# Altium PCB EstmetPCB.PcbDoc
Units mm, origin at the board's own origin, x right, y up, seen from the top; angles counter-clockwise.
Board outline 152.4 x 101.6 mm, 2 copper layers (Top Layer, Bottom Layer); 30 components, 29 nets, 121 pads, 22 vias.
Unrouted connection lines stored in the file: 39.
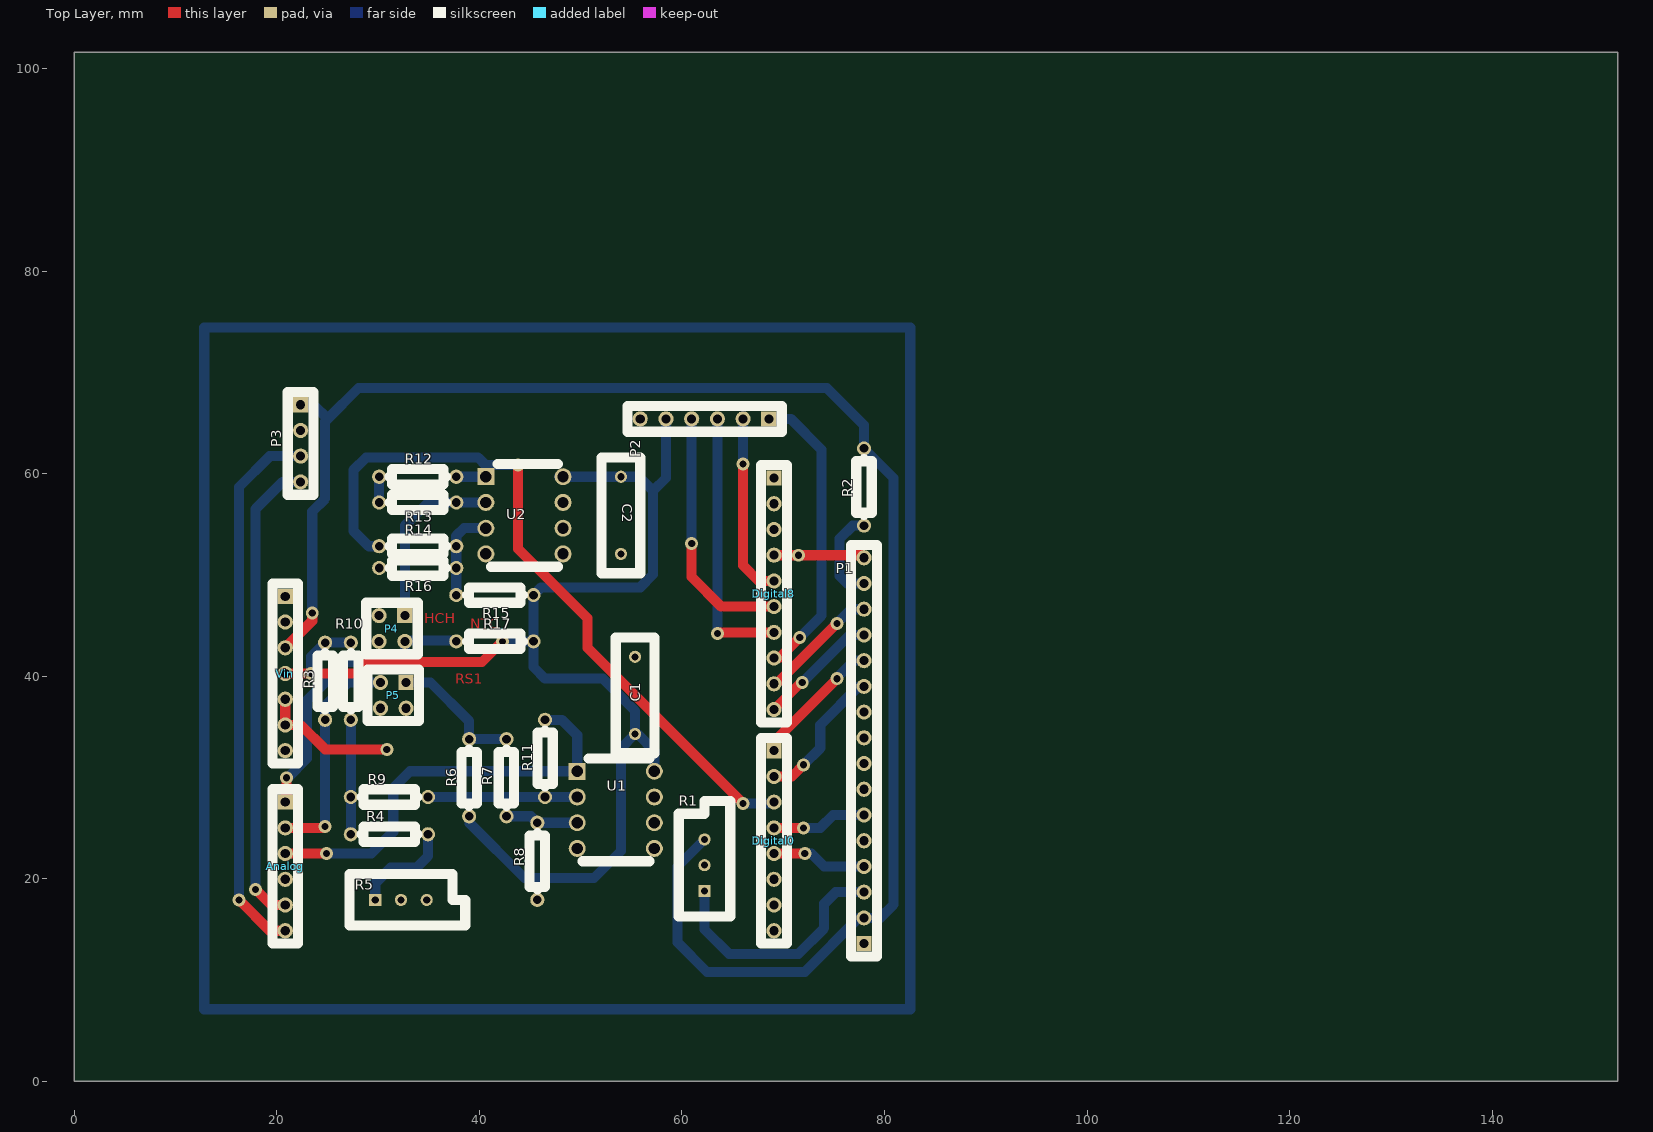
[diagram p0: Top Layer view]
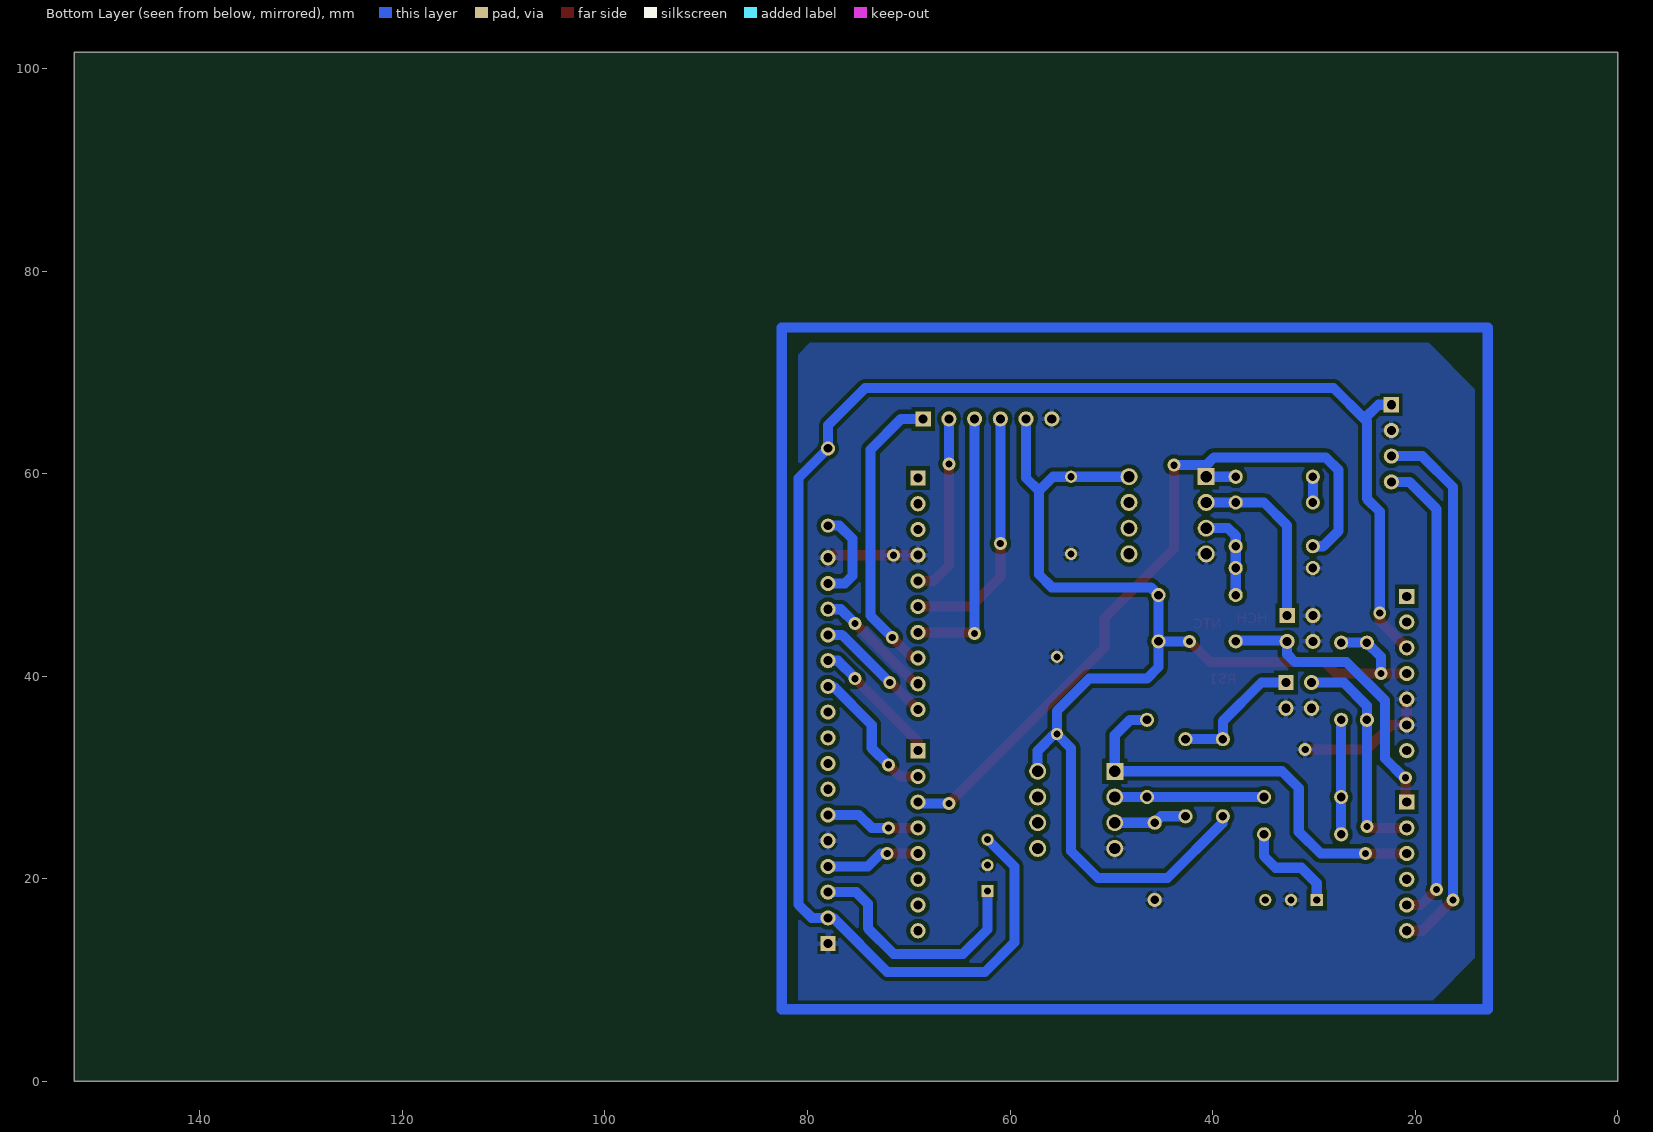
[diagram p1: Bottom Layer view, seen from below]

## Layer stack, top to bottom
Top Solder: solder mask 0.0102, Solder Resist, Dk 3.5
Top Layer: signal copper 0.0356
Dielectric 1: dielectric 0.32, FR-4, Dk 4.8
Bottom Layer: signal copper 0.0356
Bottom Solder: solder mask 0.0102, Solder Resist, Dk 3.5

## Board outline
0,0 152.4,0 152.4,101.6 0,101.6

## Design rules (kind name [scope] priority, off if disabled: settings)
Clearance [All] p1: gap=0.4 ignorepadtopadclearanceinfootprint=FALSE
PolygonConnect [All] p1: connectstyle=Relief reliefconductorwidth=0.5 reliefentries=4 polygonreliefangle="90 Angle" airgapwidth=0.254
RoomDefinition EstmetSquematic [InComponentClass('EstmetSquematic')] p1: confinementstyle=ConfineOut formatcopy=TRUE lockcomponents=FALSE outline 176.657,-14.859 386.08,-14.859 386.08,63.627 176.657,63.627
RoutingVias [All] p1: holewidth=0.711 width=1.27 viastyle="Through Hole" minholewidth=0.711 minwidth=1.27 maxholewidth=0.711 maxwidth=1.27
SolderMaskExpansion [All] p1: expansion=0.102
Width [All] p1: maxlimit=1 minlimit=1 preferedwidth=1
30 further rules are at their usual default settings.

## Classes and differential pairs
component class EstmetSquematic: Analog C1 Digital0 Digital8 P1 P2 P3 P5 R1 R2 R3 R5 R6 R7 R8 R9 R10 R11 R12 R13 R14 R15 R16 R17 U1 U2 Vin

## Components (designator, comment, footprint, x,y, rotation, side; value= is the part's Value field where it differs from the comment)
Analog "Analog" HDR1X6 20.828,27.559 r270 top
C1 "Cap" RAD-0.3 55.372,38.1 r90 top value=100nF
C2 "Cap" RAD-0.3 53.975,55.88 r270 top value=100nF
Digital0 "Header 8" HDR1X8 69.088,32.639 r270 top
Digital8 "Header 10" HDR1X10 69.088,59.563 r270 top
P1 "LCD" HDR1X16 77.978,13.589 r90 top
P2 "micro SD" HDR1X6 68.58,65.405 r180 top
P3 "BMP280" HDR1X4 22.352,66.802 r270 top
P4 "Humidity" HDR2X2#1 32.639,45.974 r180 top
P5 "Thermistors" HDR2X2#2 32.766,39.37 r270 top
R1 "RPot" VR5 62.23,21.336 r90 top value=10k
R2 "Res1" AXIAL-0.3 77.978,58.674 r90 top value=2k2
R3 "Res1" AXIAL-0.3 27.305,39.497 r90 top value=150
R4 "Res1" AXIAL-0.3 31.115,24.384 r180 top value=1k8
R5 "RPot" VR5 32.258,17.907 r0 top value=500
R6 "Res1" AXIAL-0.3 38.989,29.972 r270 top value=150
R7 "Res1" AXIAL-0.3 42.672,29.972 r90 top value=150
R8 "Res1" AXIAL-0.3 45.72,21.717 r90 top value=150
R9 "Res1" AXIAL-0.3 31.115,28.067 r180 top value=10k
R10 "Res1" AXIAL-0.3 24.765,39.497 r90 top value=2k2
R11 "Res1" AXIAL-0.3 46.482,31.877 r270 top value=470k
R12 "Res1" AXIAL-0.3 33.909,59.69 r180 top value=100k
R13 "Res1" AXIAL-0.3 33.909,57.15 r0 top value=330k
R14 "Res1" AXIAL-0.3 33.909,52.832 r0 top value=10k
R15 "Res1" AXIAL-0.3 41.529,48.006 r180 top value=10k
R16 "Res1" AXIAL-0.3 33.909,50.673 r0 top value=10k
R17 "Res1" AXIAL-0.3 41.529,43.434 r0 top value=10k
U1 "TLC2272AIP" *DIP254P762X508-8 57.277,22.987 r0 top
U2 "TLC2272AIP" *DIP254P762X508-8 48.26,52.07 r0 top
Vin "Header 7" HDR1X7 20.828,47.879 r270 top

## Footprints (in the part's own frame and the unit in brackets; to place one, negate y for a bottom-side part, rotate by r counter-clockwise, add the part's x,y. Pads: shape width x height; smd on the part's side, far side on the other; paste and mask are expansions set on the pad)
*DIP254P762X508-8 [mil]
  rect 66x66 hole 44: 1(-300,300)
  round 66 hole 44: 2(-300,200) 3(-300,100) 4(-300,0) 5(0,0) 6(0,100) 7(0,200) 8(0,300)
  silkscreen extent -280,-50 -20,350
AXIAL-0.3 [mm] "Axial Device, Thru-Hole; 2 Leads; 0.3 in Pin Spacing"
  round 1.4 hole 0.85: 1(-3.81,0) 2(3.81,0)
  silkscreen extent -2.77,-0.76 2.77,0.76
HDR1X4 [mm] "Connector; Header; 4 Position"
  rect 1.5x1.5 hole 0.9: 1(0,0)
  round 1.5 hole 0.9: 2(2.54,0) 3(5.08,0) 4(7.62,0)
  silkscreen extent -1.27,-1.27 8.89,1.27
HDR1X6 [mm] "Connector; Header; 6 Position"
  rect 1.5x1.5 hole 0.9: 1(0,0)
  round 1.5 hole 0.9: 2(2.54,0) 3(5.08,0) 4(7.62,0) 5(10.16,0) 6(12.7,0)
  silkscreen extent -1.27,-1.27 13.97,1.27
HDR1X7 [mm] "Connector; Header; 7 Position"
  rect 1.5x1.5 hole 0.9: 1(0,0)
  round 1.5 hole 0.9: 2(2.54,0) 3(5.08,0) 4(7.62,0) 5(10.16,0) 6(12.7,0) 7(15.24,0)
  silkscreen extent -1.27,-1.27 16.51,1.27
HDR1X8 [mm] "Connector; Header; 8 Position"
  rect 1.5x1.5 hole 0.9: 1(0,0)
  round 1.5 hole 0.9: 2(2.54,0) 3(5.08,0) 4(7.62,0) 5(10.16,0) 6(12.7,0) 7(15.24,0) 8(17.78,0)
  silkscreen extent -1.27,-1.27 19.05,1.27
HDR1X10 [mm] "Connector; Header; 10 Position"
  rect 1.5x1.5 hole 0.9: 1(0,0)
  round 1.5 hole 0.9: 2(2.54,0) 3(5.08,0) 4(7.62,0) 5(10.16,0) 6(12.7,0) 7(15.24,0) 8(17.78,0) 9(20.32,0) 10(22.86,0)
  silkscreen extent -1.27,-1.27 24.13,1.27
HDR1X16 [mm] "Connector; Header; 16 Position"
  rect 1.5x1.5 hole 0.9: 1(0,0)
  round 1.5 hole 0.9: 2(2.54,0) 3(5.08,0) 4(7.62,0) 5(10.16,0) 6(12.7,0) 7(15.24,0) 8(17.78,0) 9(20.32,0) 10(22.86,0) 11(25.4,0) 12(27.94,0) 13(30.48,0) 14(33.02,0) 15(35.56,0) 16(38.1,0)
  silkscreen extent -1.27,-1.27 39.37,1.27
HDR2X2#1 [mm] "Connector; Header; 2x2 Position"
  rect 1.5x1.5 hole 0.9: 1(0,0)
  round 1.5 hole 0.9: 2(0,2.54) 3(2.54,0) 4(2.54,2.54)
  silkscreen extent -1.27,-1.27 3.81,3.81
HDR2X2#2 [mm] "Connector; Header; 2x2 Position"
  rect 1.5x1.5 hole 0.9: 1(0,0)
  round 1.5 hole 0.9: 2(0,-2.54) 3(2.54,0) 4(2.54,-2.54)
  silkscreen extent -1.27,-3.81 3.81,1.27
RAD-0.3 [mm] "Radial Cap, Thru-Hole; 2 Leads; 0.3 in Pin Spacing"
  round 1.2 hole 0.7: 1(-3.81,0) 2(3.81,0)
  silkscreen extent -5.71,-1.91 5.71,1.91
VR5 [mm] "Thru-Hole; 3 Leads"
  rect 1.2x1.2 hole 0.7: 1(-2.54,0)
  round 1.2 hole 0.7: 2(0,0) 3(2.54,0)
  silkscreen extent -5.08,-2.54 6.35,2.54

## Part data
Analog P2: library part "Header 6", "Header, 6-Pin", LatestRevisionDate=17-Jul-2002, LatestRevisionNote="Re-released for DXP Platform.", Publisher="Altium Limited"
C1 C2: "Capacitor", LatestRevisionDate=17-Jul-2002, LatestRevisionNote="Re-released for DXP Platform.", PackageDescription="Radial Cap, Thru-Hole; 2 Leads; 0.3 in Pin Spacing", PackageReference=RAD-0.3, Published=8-Jun-2000, Publisher="Altium Limited"
Digital0: "Header, 8-Pin", LatestRevisionDate=17-Jul-2002, LatestRevisionNote="Re-released for DXP Platform.", Publisher="Altium Limited"
Digital8: "Header, 10-Pin", LatestRevisionDate=17-Jul-2002, LatestRevisionNote="Re-released for DXP Platform.", Publisher="Altium Limited"
P1: library part "Header 16", "Header, 16-Pin", LatestRevisionDate=17-Jul-2002, LatestRevisionNote="Re-released for DXP Platform.", Publisher="Altium Limited"
P3: library part "Header 4", "Header, 4-Pin", LatestRevisionDate=17-Jul-2002, LatestRevisionNote="Re-released for DXP Platform.", Publisher="Altium Limited"
P4 P5: library part "Header 2X2", "Header, 2-Pin, Dual row", LatestRevisionDate=17-Jul-2002, LatestRevisionNote="Re-released for DXP Platform.", Publisher="Altium Limited"
R1 R5: "Potentiometer", LatestRevisionDate=17-Jul-2002, LatestRevisionNote="Re-released for DXP Platform.", PackageDescription="Variable Resistor, Thru-Hole; 3 Leads", PackageReference=VR5, Published=8-Jun-2000, Publisher="Altium Limited", Set Position=0.5, Sim Note="Enter the Resistance value and the set point into parameter fields."
R2 R3 R4 R6 R7 R8 R9 R10 R11 R12 R13 R14 R15 R16 R17: "Resistor", LatestRevisionDate=17-Jul-2002, LatestRevisionNote="Re-released for DXP Platform.", PackageDescription="Axial Device, Thru-Hole; 2 Leads; 0.3 in Pin Spacing", PackageReference=AXIAL-0.3, Published=8-Jun-2000, Publisher="Altium Limited"
U1 U2: "Advanced LinCMOS_TM_ ail-To- ail Dual Operational Amplifier 8-PDIP", Package="PDIP-8 Texas Instruments", Availability=Unavailable, MF="Texas Instruments", MP=TLC2272AIP, Price=None, SnapEDA_Link=https://www.snapeda.com/parts/TLC2272AIP/Texas%20Instruments/view-part/?ref=snap
Vin: "Header, 7-Pin", LatestRevisionDate=17-Jul-2002, LatestRevisionNote="Re-released for DXP Platform.", Publisher="Altium Limited"

## Via types
v1: diameter 1.27, hole 0.711, Top Layer to Bottom Layer, 22 vias

## Nets (pads, with @x,y where several pads share a name; then routed paths per layer and width w, separated by ;. In a path a pad name is that pad's centre, name@x,y a point inside that pad or via, vN(x,y) a via of type N, cw(c..) or ccw(c..) an arc to the next point about the centre after c; other vN are vias at no path point)
3V3: P1.2 P3.1 R1.3 R2.2 Vin.3 | length 168.7
  Top Layer w1: Vin.3 23.495,45.466 v1(23.495,46.228)
  Bottom Layer w1: Vin.3 Vin.3@21.082,42.799 ; P3.1 23.622,66.802 25.019,65.405 ; v1(23.495,46.228) 23.495,56.261 24.765,57.531 24.765,65.151 25.019,65.405 ; R1.3 59.563,21.209 59.563,13.716 62.484,10.795 72.128,10.795 77.462,16.129 P1.2 79.591,16.129 80.899,17.437 80.899,59.563 R2.2 77.978,64.77 74.295,68.453 52.324,68.453 28.067,68.453 25.019,65.405
5V: C1.1 C2.1 P2.5 R3.2 R6.2 R10.2 R15.1 R17.2 U1.8 U2.8 Vin.4 | length 126.8
  Top Layer w1: Vin.4 v1(23.368,40.259) 27.813,40.259 28.956,41.402 40.259,41.402 v1(42.291,43.434)
  Bottom Layer w1: Vin.4 Vin.4@20.955,40.259 ; v1(23.368,40.259) 23.368,41.91 R10.2 R3.2 ; R6.2 R6.2@39.052,26.098 ; 39.052,25.463 44.45,20.066 51.308,20.066 53.975,22.733 53.975,32.893 C1.1 ; v1(42.291,43.434) R17.2 ; U2.8@47.879,59.69 U2.8 C2.1 55.753,59.69 57.15,58.293 ; U1.8 57.277,32.639 55.626,34.29 C1.1 ; P2.5 58.42,59.563 57.15,58.293 ; R17.2 R15.1 46.101,48.768 55.88,48.768 57.15,50.038 57.15,58.293 ; R17.2 45.339,40.894 46.482,39.751 52.197,39.751 55.372,36.576 C1.1
CS: Digital8.8 P2.1 | length 29.3
  Top Layer w1: Digital8.8 69.596,41.783 v1(71.628,43.815)
  Bottom Layer w1: P2.1 70.739,65.405 73.787,62.357 73.787,45.974 v1(71.628,43.815)
D4: Digital0.2 P1.11 | length 13.9
  Top Layer w1: Digital0.2 70.866,30.099 v1(72.009,31.242)
  Bottom Layer w1: v1(72.009,31.242) 73.66,32.893 73.66,35.179 77.47,38.989 P1.11
D5: Digital0.1 P1.12 | length 13.1
  Top Layer w1: Digital0.1 69.088,33.528 v1(75.311,39.751)
  Bottom Layer w1: v1(75.311,39.751) 75.311,39.84 77,41.529 P1.12
D6: Digital8.10 P1.13 | length 12.2
  Top Layer w1: Digital8.10 71.755,39.37 v1(71.882,39.37)
  Bottom Layer w1: Digital8.10 Digital8.10@69.342,36.703 ; v1(71.882,39.37) 76.581,44.069 P1.13
D7: Digital8.9 P1.14 | length 12.2
  Top Layer w1: Digital8.9 69.342,39.243 v1(75.311,45.212)
  Bottom Layer w1: Digital8.9 Digital8.9@69.342,39.243 ; v1(75.311,45.212) 76.708,46.609 P1.14
E: Digital0.4 P1.6 | length 9.4
  Top Layer w1: Digital0.4 v1(72.009,25.019)
  Bottom Layer w1: v1(72.009,25.019) 73.66,25.019 74.93,26.289 P1.6
GND: C1.2 C2.2 Digital8.4 P1.1 P1.5 P1.16 P2.6 P3.2 P4.3 P4.4 P5.3 P5.4 R1.2 R5.2 R8.1 R16.1 U1.4 U2.4 Vin.5 Vin.6 | length 22.6
  Top Layer w1: Vin.5 Vin.6 22.352,35.179 24.765,32.766 v1(30.861,32.766) ; Digital8.4 77.724,51.943 P1.16
  other v1: 71.501,51.943
HCH1000: P4.1 R13.2 U2.2 | length 17.8
  Bottom Layer w1: P4.1 32.639,54.864 34.925,57.15 R13.2 U2.2
Hum: Digital0.3 R12.1 R14.1 U2.1 | length 75.8
  Top Layer w1: v1(43.815,60.833) 43.815,52.578 50.673,45.72 50.673,42.799 v1(66.04,27.432)
  Bottom Layer w1: R14.1 29.083,52.832 27.559,54.356 27.559,60.325 28.829,61.595 39.878,61.595 40.64,60.833 ; R12.1 U2.1 40.64,60.833 ; v1(43.815,60.833) 40.64,60.833 ; v1(66.04,27.432) Digital0.3@68.961,27.432
MISO: Digital8.6 P2.4 | length 25
  Top Layer w1: v1(60.96,53.086) 60.96,49.784 63.881,46.863 Digital8.6
  Bottom Layer w1: v1(60.96,53.086) P2.4
MOSI: Digital8.7 P2.3 | length 26.8
  Top Layer w1: v1@63.5,44.323 Digital8.7
  Bottom Layer w1: v1(63.5,44.196) P2.3
NetP1_15: P1.15 R2.1 | length 9.3
  Bottom Layer w1: P1.15 76.327,49.149 75.565,49.911 75.565,53.56 76.869,54.864 R2.1
NetR3_1: R3.1 R4.2 R9.2 | length 11.3
  Bottom Layer w1: R4.2 R9.2 R3.1
NetR4_1: R4.1 R5.1 | length 10.1
  Bottom Layer w1: R5.1 29.718,19.558 31.242,21.082 33.782,21.082 34.925,22.225 R4.1
NetR7_1: R7.1 R8.2 U1.3 | length 7.2
  Bottom Layer w1: R7.1 45.085,26.162 R8.2 U1.3
NetR9_1: R9.1 R11.2 U1.2 | length 14.7
  Bottom Layer w1: R9.1 R11.2 U1.2
NetR12_2: R12.2 R13.1 | length 2.5
  Bottom Layer w1: R13.1 R12.2
NetR14_2: R14.2 R15.2 R16.2 U2.3 | length 9.1
  Bottom Layer w1: R15.2 R16.2 R14.2 37.719,53.848 38.481,54.61 U2.3
NTC10000: Analog.1 P4.2 R17.1 | length 28.9
  Top Layer w1: Analog.1 20.955,27.686 v1(20.955,29.972)
  Bottom Layer w1: v1(20.955,29.972) 21.082,29.972 22.987,31.877 22.987,34.919 22.965,34.941 22.965,37.57 26.797,41.402 31.877,41.402 32.639,42.164 P4.2 32.639,43.529 R17.1@37.624,43.529
RS: Digital0.5 P1.4 | length 8.8
  Top Layer w1: Digital0.5 v1(72.136,22.479)
  Bottom Layer w1: 72.771,22.479 74.041,21.209 P1.4
Rs1: P5.1 R6.1 R7.2 | length 12.6
  Bottom Layer w1: P5.1 35.179,39.37 38.989,35.56 R6.1 R7.2@42.037,33.782
Rs2: Analog.2 P5.2 R10.1 | length 22.3
  Top Layer w1: Analog.2 24.638,25.019 v1(24.765,25.146)
  Bottom Layer w1: v1(24.765,25.146) R10.1 24.765,37.084 27.051,39.37 P5.2
SCK: Digital8.5 P2.2 | length 18.4
  Top Layer w1: v1(66.04,60.96) 66.04,50.927 67.564,49.403 Digital8.5
  Bottom Layer w1: v1(66.04,60.96) P2.2 P2.2@66.04,65.659
SCL: Analog.6 P3.3 | length 54
  Top Layer w1: v1(16.256,17.907) 19.304,14.859 Analog.6
  Bottom Layer w1: v1(16.256,17.907) 16.256,58.674 19.304,61.722 P3.3
SDA: Analog.5 P3.4 | length 46.7
  Top Layer w1: v1(17.907,18.923) 19.431,17.399 Analog.5
  Bottom Layer w1: v1(17.907,18.923) 17.907,56.515 20.574,59.182 P3.4
V0: P1.3 R1.1 | length 24.5
  Bottom Layer w1: R1.1 62.23,14.986 64.643,12.573 71.501,12.573 74.041,15.113 74.041,17.526 75.184,18.669 P1.3
VS1: Analog.3 R11.1 U1.1 | length 42.1
  Top Layer w1: Analog.3 v1(24.892,22.479)
  Bottom Layer w1: v1(24.892,22.479) 29.337,22.479 31.496,24.638 31.496,28.956 33.147,30.607 U1.1 49.657,34.163 48.133,35.687 R11.1
pads on no net: Analog.4 Digital0.6 Digital0.7 Digital0.8 Digital8.1 Digital8.2 Digital8.3 P1.7 P1.8 P1.9 P1.10 R5.3 U1.5 U1.6 U1.7 U2.5 U2.6 U2.7 Vin.1 Vin.2 Vin.7
copper on no net: | length 274.1
  Bottom Layer w1: 12.827,7.112 82.55,7.112 82.55,74.422 12.827,74.422 12.827,7.112

## Polygon pours and split planes (outlines as drawn)
no net on Top Layer "Bottom Layer-No Net" (solid, pour order 2): 19.05,13.081
GND on Bottom Layer "Bottom Layer-No Net" (solid, pour order 6): 14.097,68.326 18.669,72.898 79.756,72.898 80.899,71.755 80.899,7.747 18.542,7.747 14.097,12.192

## Other copper
Top Layer:
  text "HCH" at 34.544,45.212 h1
  text "NTC" at 39.116,44.704 h1
  text "RS1" at 37.592,39.243 h1